# Altium PCB ppg_reconstruct.PcbDoc
Units mil, origin at the board's own origin, x right, y up, seen from the top; angles counter-clockwise.
Board outline 6000 x 4000 mil, 2 copper layers (Top Layer, Bottom Layer); 19 components, 10 nets, 70 pads, 12 vias.
Unrouted connection lines stored in the file: 5.
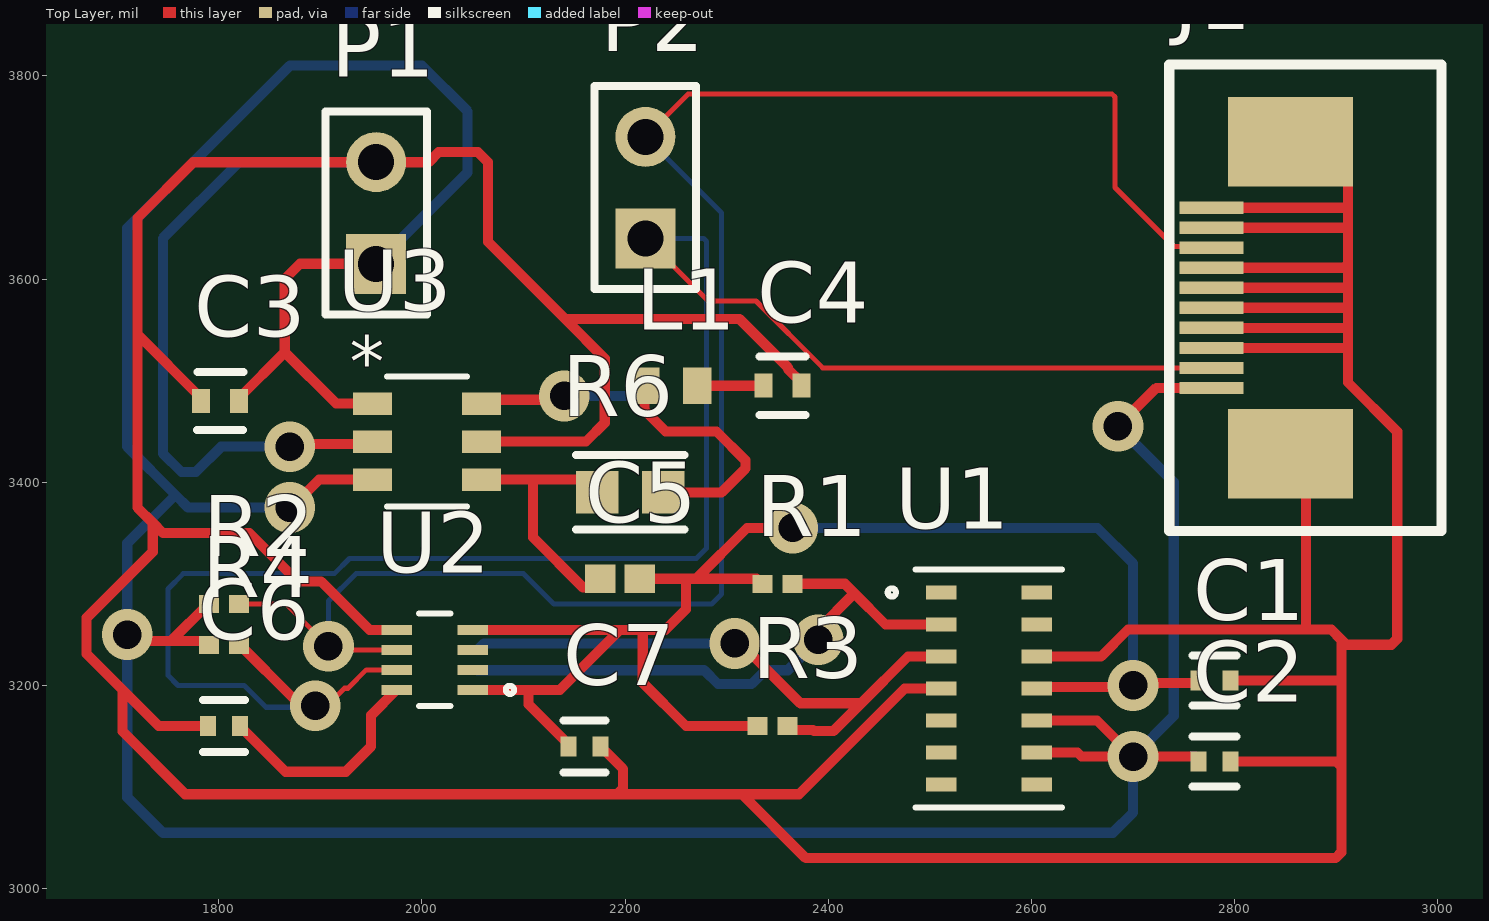
[diagram p0: Top Layer view]
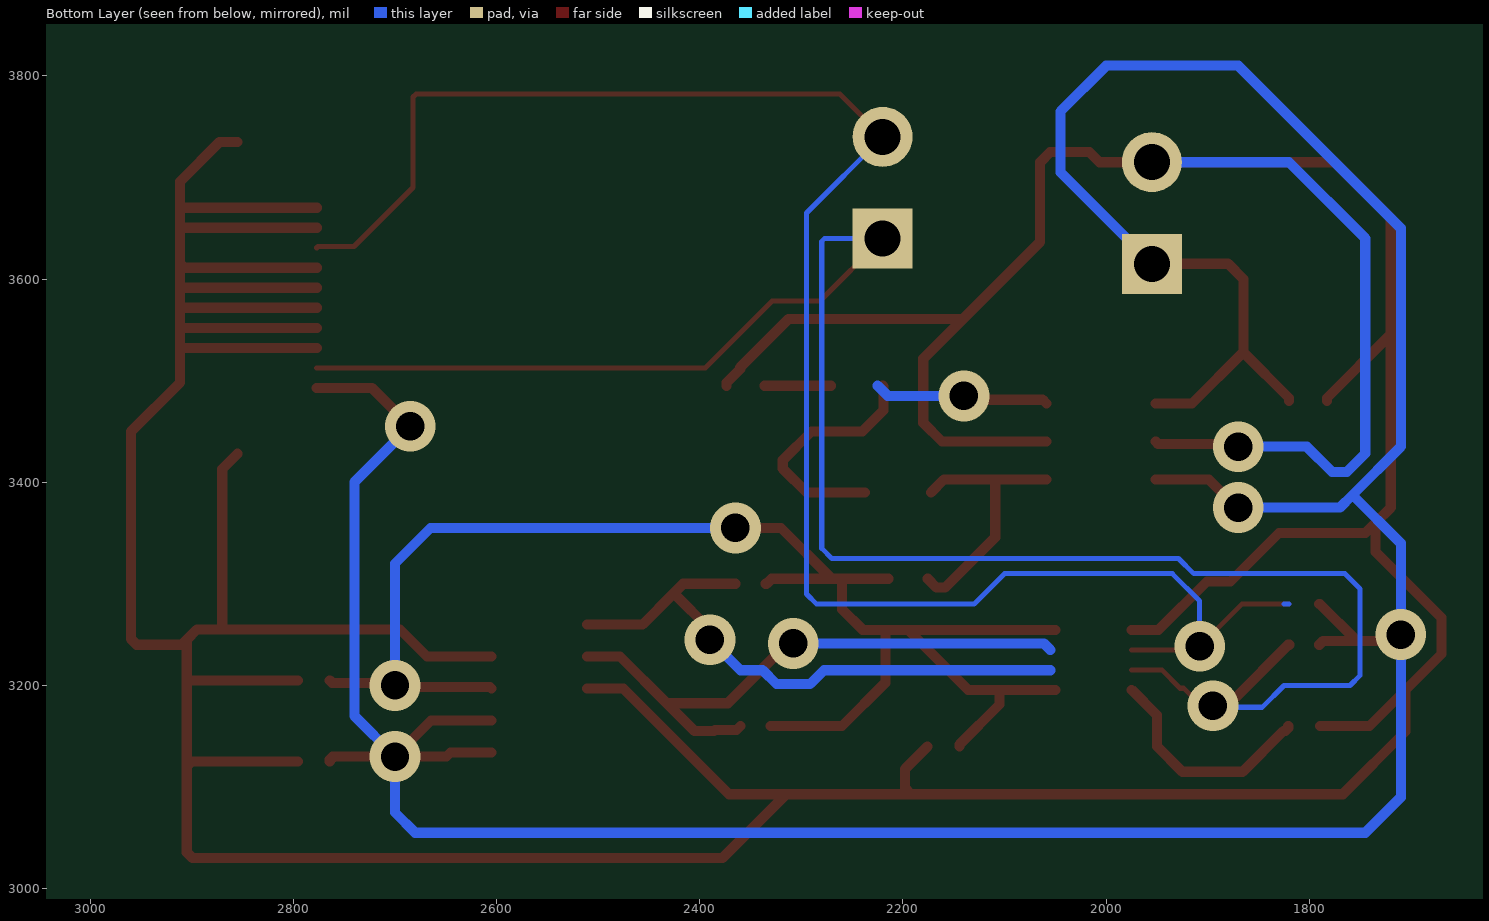
[diagram p1: Bottom Layer view, seen from below]
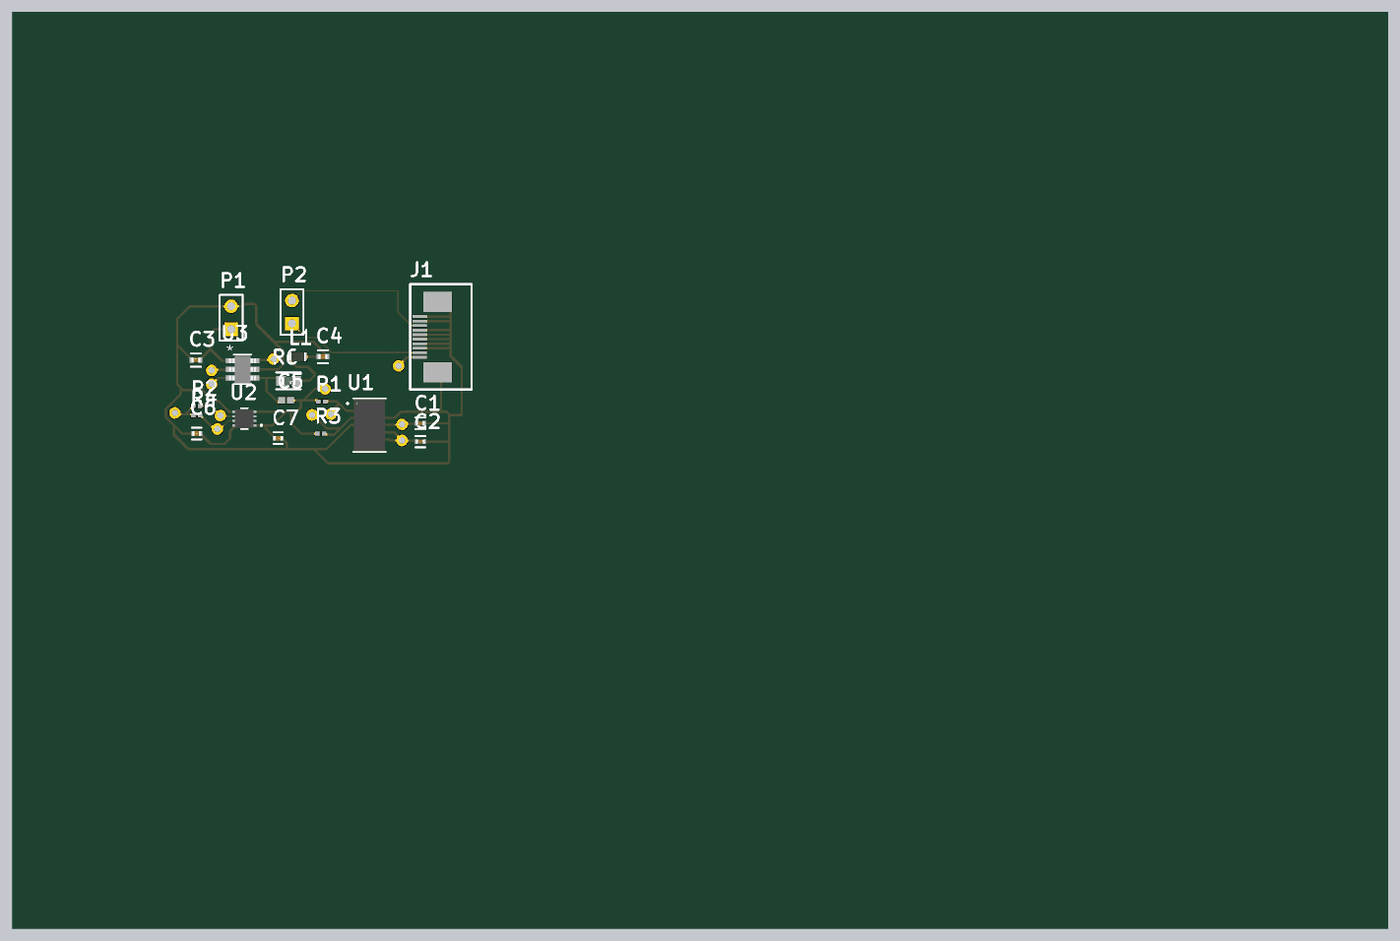
[diagram p2: 3D render of the assembled board from above, using the file's embedded part models]

## Layer stack, top to bottom
Top Solder: solder mask 0.4, Solder Resist, Dk 3.5
Top Layer: signal copper 1.4
Dielectric 1: dielectric 12.6, FR-4, Dk 4.8
Bottom Layer: signal copper 1.4
Bottom Solder: solder mask 0.4, Solder Resist, Dk 3.5

## Board outline
1000,1000 7000,1000 7000,5000 1000,5000

## Design rules (kind name [scope] priority, off if disabled: settings)
Clearance [All] p1: gap=10 ignorepadtopadclearanceinfootprint=FALSE except(0: Arc-Hole Track-Hole SMDPad-Hole THPad-Hole Via-Hole Fill-Hole Poly-Hole Region-Hole Text-Hole)
PolygonConnect [All] p1: connectstyle=Relief reliefconductorwidth=10 reliefentries=4 polygonreliefangle="90 Angle" airgapwidth=10
RoomDefinition ppg_reconstruct [InComponentClass('ppg_reconstruct')] p1: confinementstyle=ConfineIn formatcopy=TRUE lockcomponents=FALSE outline 2063,3985.51 5548,3985.51 5548,4565.51 2063,4565.51
RoutingVias [All] p1: holewidth=28 width=50 viastyle="Through Hole" minholewidth=28 minwidth=50 maxholewidth=28 maxwidth=50
SolderMaskExpansion [All] p1: expansion=4 istentingtop=FALSE
Width [All] p1: maxlimit=15 minlimit=1 preferedwidth=10 checkconnectedcopper=TRUE
30 further rules are at their usual default settings.

## Components (designator, comment, footprint, x,y, rotation, side; value= is the part's Value field where it differs from the comment)
C1 "GRM155R61A105KE15D" FP-GRM15-0_1-MFG 2780,3205 r0 top value=1uF
C2 "GRM155R61A105KE15D" FP-GRM15-0_1-MFG 2780,3125 r0 top value=1uF
C3 "GRM155R60J475ME87D" FP-GRM155-0_15-MFG 1801.3,3480 r180 top
C4 "GRM155R60J475ME87D" FP-GRM155-0_15-MFG 2355,3495 r0 top
C5 "GRM155R71E562KA01D" CAPC1005X55X25ML05T10 2195,3305 r0 top
C6 "C1005X7R1C104K050BC" FP-C1005-050-0_05-MFG 1805,3160 r180 top
C7 "C1005X7R1C104K050BC" FP-C1005-050-0_05-MFG 2160,3140 r0 top
J1 "ZF5S-10-01-X-WT" ZF5S-10-01-X-WT 2777,3581.5 r90 top
L1 "GLFR1608T4R7M-LR" INDC1608X100X35LL20T15 2245.59,3495 r0 top
P1 "Header 2" HDR1X2 1955,3615 r90 top
P2 "Header 2" HDR1X2 2220,3640 r90 top
R1 "RC0402JR-074K7L" RESC1005X40X25LL05T10 2350,3300 r0 top
R2 "RC0402JR-074K7L" RESC1005X40X25LL05T10 1805.24,3280 r0 top
R3 "RC0402JR-074K7L" RESC1005X40X25LL05T10 2345.24,3160 r0 top
R4 "RC0402JR-074K7L" RESC1005X40X25LL05T10 1805,3240 r0 top
R6 "MCT06030C4751FP500" FP-MCT0603-IPC_A 2205,3390 r0 top
U1 "MAX30102EFD+" 21-1048_F143A5+1_MXM 2558,3197.01 r0 top
U2 "MAX14595ETA+" 21-0487_T822CN+1_MXM 2012.5,3225.16 r180 top
U3 "MAX1921EUT18+" 21-0058I_MXM 2005,3440 r0 top

## Footprints (in the part's own frame and the unit in brackets; to place one, negate y for a bottom-side part, rotate by r counter-clockwise, add the part's x,y. Pads: shape width x height; smd on the part's side, far side on the other; paste and mask are expansions set on the pad)
21-0058I_MXM [mil]
  rect 38.5x22 smd paste+0 mask+0: 1(-53.75,37.4) 2(-53.75,0) 3(-53.75,-37.4) 4(53.75,-37.4) 5(53.75,0) 6(53.75,37.4)
  silkscreen extent -40,-64 40,64, body extent -59,-59 59,59, height 57
21-0487_T822CN+1_MXM [mil]
  rect 30x10 smd paste+0 mask+0: 1(-37.5,29.53) 2(-37.5,9.84) 3(-37.5,-9.84) 4(-37.5,-29.53) 5(37.5,-29.53) 6(37.5,-9.84) 7(37.5,9.84) 8(37.5,29.53)
  silkscreen extent -78,-46 15,46, body extent -41,-41 41,41, height 32
21-1048_F143A5+1_MXM [mil]
  rect 30x14 smd paste+0 mask+0: 1(-47,94.49) 2(-47,62.99) 3(-47,31.5) 4(-47,0) 5(-47,-31.5) 6(-47,-62.99) 7(-47,-94.49) 8(47,-94.49) 9(47,-62.99) 10(47,-31.5) 11(47,0) 12(47,31.5) 13(47,62.99) 14(47,94.49)
  silkscreen extent -99,-117 72,117, body extent -67,-112 67,112, height 65
CAPC1005X55X25ML05T10 [mm] "Chip Capacitor, 2-Leads, Body 1.00x0.50mm, IPC Low Density"
  rect 0.76x0.72 smd: 1(-0.49,0) 2(0.49,0)
  body extent -0.53,-0.28 0.53,0.27, height 0.55
FP-C1005-050-0_05-MFG [mm]
  rect 0.4x0.5 smd paste+0 mask+0: 1(-0.4,0) 2(0.4,0)
  silkscreen extent -0.53,-0.65 0.53,0.65, body extent -0.7,-0.38 0.7,0.38, height 0.25
FP-GRM15-0_1-MFG [mm]
  rect 0.4x0.5 smd paste+0 mask+0: 1(-0.4,0) 2(0.4,0)
  silkscreen extent -0.55,-0.63 0.55,0.63, body extent -0.7,-0.38 0.7,0.38, height 0.25
FP-GRM155-0_15-MFG [mm]
  rect 0.45x0.6 smd paste+0 mask+0: 1(-0.475,0) 2(0.475,0)
  silkscreen extent -0.58,-0.73 0.58,0.72, body extent -0.8,-0.43 0.8,0.43, height 0.25
FP-MCT0603-IPC_A [mil]
  rect 41.88x41.82 smd paste+0 mask+0: 1(-32.65,0) 2(32.65,0)
  silkscreen extent -54,-37 54,37, body extent -73,-41 73,41, height 10
HDR1X2 [mm] "Connector; Header; 2 Position"
  rect 1.5x1.5 hole 0.9: 1(0,0)
  round 1.5 hole 0.9: 2(2.54,0)
  silkscreen extent -1.27,-1.27 3.81,1.27
INDC1608X100X35LL20T15 [mm] "Chip Inductor, 2-Leads, Body 1.8x1mm, IPC High Density"
  rect 0.71x0.92 smd: 1(-0.65,0) 2(0.65,0)
  body extent -0.9,-0.5 0.9,0.5, height 1
RESC1005X40X25LL05T10 [mm] "Chip Resistor, 2-Leads, Body 1.00x0.50mm, IPC High Density"
  rect 0.5x0.45 smd: 1(-0.375,0) 2(0.375,0)
  body extent -0.53,-0.27 0.53,0.28, height 0.4
ZF5S-10-01-X-WT [mil]
  rect 12x63 smd mask+2: 1(-88.65,0) 2(-68.95,0) 3(-49.25,0) 4(-29.55,0) 5(-9.85,0) 6(9.85,0) 7(29.55,0) 8(49.25,0) 9(68.95,0) 10(88.65,0)
  rect 88x123 smd mask+2: G1(-153.5,-78) G2(153.5,-78)
  silkscreen extent -230,-226 230,42

## Part data
C1 C2: library part CMP-2008-04556-2, "CAP CER 1UF 10V X5R 0402", Capacitance=1uF, Manufacturer=Murata, Package=GRM15-0.1, Temperature="-55°C to +85°C", Temperature Characteristic=X5R, Temperature Coefficient=15%, Temperature Range High=+85°C, Temperature Range Low=-55°C, Tolerance=10%, Voltage Rating=10V, Automotive=No, Category=Cap, ComponentLink2Description=Datasheet, ComponentLink2URL=https://search.murata.co.jp/Ceramy/image/img/A01X/G101/ENG/GRM155R61A105KE15-01A.pdf, Device Class L1="Passive Components", Device Class L2=Capacitors, Device Class L3="Ceramic Capacitors", Digikey Description="CAP CER 1UF 10V X5R 0402", Height=0.55mm, Ipc Land Pattern Name=CAPC10050X50, Lead Free=Yes, Manufacturer Part Number=GRM155R61A105KE15D, Material=Ceramic, Mouser Description="0402 1 uF 10 V ±10% Tolerance X5R Surface Mount Multilayer Ceramic Capacitor", Octopart=https://octopart.com/grm155r61a105ke15d-murata-197442, RoHS=TRUE
C3 C4: library part CMP-2008-04550-5, "Chip Multilayer Ceramic Capacitors for General Purpose, 0402, 4.7uF, X5R, 15%, 20%, 6.3V", Capacitance=4.7uF, Case Code (Imperial)=0402, Case Code (Metric)=1005, Dielectric=X5R, Max Operating Temperature=85°C, Min Operating Temperature=-55°C, Package Quantity=1, Tolerance=20%, Voltage=6.3V, Case/Package=0402, Construction=Flat, Depth=0.5mm, Height=0.5mm, Lead Free="Lead Free", Length=1mm, Mount="Surface Mount", Packaging="Tape and Reel", Radiation Hardening=No, REACH SVHC="No SVHC", Series=GRM, Thickness=0.022inch, Voltage Rating=6.3V, Voltage Rating (DC)=6.3V, Width=0.02inch
C5: library part CMP-2008-04631-1, Manufacturer=Murata, Part Number=GRM155R71E562KA01D
C6 C7: library part CMP-08246-004182-1, "Multilayer Ceramic Capacitors 100nF ±10% 16V X7R SMD 0402", Capacitance=100nF, Case Code (Imperial)=0402, Case Code (Metric)=1005, Dielectric=X7R, Dielectric Material=Ceramic, Max Operating Temperature=125°C, Min Operating Temperature=-55°C, Package Quantity=1, Tolerance=10%, Voltage=16V, Case/Package=0402, Construction=Flat, Depth=0.5mm, Height=0.5mm, Lead Free="Lead Free", Length=1mm, Mount="Surface Mount", Number of Pins=2, Packaging="Tape and Reel", Radiation Hardening=No, Resistor Type=Ceramic, RoHS Compliant=Yes, Series=C, Termination=SMD/SMT, Thickness=0.022inch, Voltage Rating=16V, Voltage Rating (DC)=16V, Weight=2.3E-05oz, Width=0.02inch
J1: "ZERO INSERTION FORCE 0.5MM ASSEMBLY, 01 LEAD STYLE.", Manufacturer=SAMTEC, CREATED="January 30, 2015 - Wendy Xin", PCB DECAL=ZF5S-10-01-X-WT
L1: library part CMP-2000-06322-1, "Chip Inductor, 4.7 uH, +/- 20%, -40 to 105 degC, 0603 (1608 Metric), RoHS, Tape and Reel", Current - Saturation=170mA, Current Rating=110mA, DC Resistance (DCR)=240mOhm, Inductance=4.7µH, Manufacturer=TDK, Operating Temperature=-40°C~105°C, Package / Case=0603(1608Metric), Package Description="2-Pin Surface Mount Device, Body 1.6 x 0.8 mm", Package Reference=0603, Standard Package=4,000, Tolerance=±20%, Catalog Drawings="1608(0603)Top /  / 1608(0603)Side", Category=Inductors,Coils,Chokes, Datasheet URL=http://media.digikey.com/pdf/Data%20Sheets/TDK%20PDFs/GLFR%20Series.pdf, Datasheet Version=07/2008, Dynamic Catalog=GLFRSeries, Family=FixedInductors, Manufacturer URL=http://www.tdk.com/, Mounting Technology=SurfaceMount, Mounting Type=SurfaceMount, Other Names=445-3607-2, Other Related Documents=1608(0603)Footprint, Packaging=Tape&Reel(TR), Series=GLFR, Shielding=Shielded, Size / Dimension="0.063\"Lx0.031\"Wx0.031\"H(1.60mmx0.80mmx0.80mm)"
P1 P2: "Header, 2-Pin", LatestRevisionDate=17-Jul-2002, LatestRevisionNote="Re-released for DXP Platform.", Publisher="Altium Limited"
R1 R2 R3 R4: library part CMP-2002-08011-1, Manufacturer="Yageo / Phycomp", Part Number=RC0402JR-074K7L
R6: library part CMP-02407-008681-1, "RES SMD 100 OHM 1% 1/8W 0603", Case Code (Imperial)=0603, Case Code (Metric)=1608, Max Operating Temperature=125°C, Max Power Dissipation=125mW, Min Operating Temperature=-55°C, Package Quantity=1, Resistance=4.75kR, Temperature Coefficient=50ppm/°C, Tolerance=1%, Case/Package=0603, Composition="Thin Film", Contact Plating=Tin, Depth=0.85mm, Height=0.022inch, Lead Free="Lead Free", Length=0.061inch, Military Standard=Not, Number of Terminations=2, Packaging="Tape and Reel", Radiation Hardening=No, Width=0.033inch
U1 U2 U3: "No Description Available", Mfr_Name="Analog Devices Inc", Copyright="Copyright (C) 2023 Ultra Librarian. All rights reserved.", RefDes=RefDes, Type=DEV
  U1: Manufacturer_Part_Number=MAX30102EFD+
  U2: Manufacturer_Part_Number=MAX14595ETA+
  U3: Manufacturer_Part_Number=MAX1921EUT18+

## Via types
v1: diameter 50, hole 28, Top Layer to Bottom Layer, 12 vias

## Nets (pads, with @x,y where several pads share a name; then routed paths per layer and width w, separated by ;. In a path a pad name is that pad's centre, name@x,y a point inside that pad or via, vN(x,y) a via of type N, cw(c..) or ccw(c..) an arc to the next point about the centre after c; other vN are vias at no path point)
1V8: C1.1 C5.2 C7.1 R1.1 R3.1 U1.11 U2.1 U2.4 | length 1543.4
  Top Layer w10: U2.1 2105,3195.63 ; U2.4 2195,3254.69 ; C7.1 2144.25,3141.97 2105,3181.22 2105,3195.63 ; C5.2 2260,3305 ; R3.1 2260,3160 2217.34,3202.66 2217.34,3254.69 ; R1.1 2334.25,3300 2329.25,3305 2270,3305 ; v1(2365,3355) 2320,3355 2270,3305 ; U1.11 2606.5,3198.5 2698.5,3198.5 2702.5,3202.5 2761.75,3202.5 C1.1 ; 2105,3195.63 2135.94,3195.63 2195,3254.69 ; 2195,3254.69 2217.34,3254.69 ; 2217.34,3254.69 2239.69,3254.69 2260,3275 2260,3305 ; 2260,3305 2270,3305
  Bottom Layer w10: v1(2365,3355) 2665,3355 2700,3320 v1(2700,3200)
GND: C1.2 C2.2 C3.2 C4.2 C6.2 C7.2 J1.3 J1.4 J1.5 J1.6 J1.7 J1.9 J1.10 J1.G1 J1.G2 P1.2 U1.4 U1.12 U2.5 U3.2 U3.5 | length 6802.1
  Top Layer w10: C3.2 1782.6,3482.95 1720,3545.55 ; C6.2 1740.86,3160 1705.43,3195.43 ; v1(1870,3435) 1872.5,3437.5 1948.75,3437.5 U3.2 ; U2.5 1948.45,3254.69 1900.79,3302.34 1877.66,3302.34 1830,3350 1745,3350 1735,3360 ; U3.5 2161.57,3440 2180,3458.43 2180,3521.57 2140.78,3560.78 ; C7.2 2197.9,3117.85 2197.9,3098.76 2192.04,3092.9 ; C4.2 2373.7,3497.95 2360.16,3511.5 2360.16,3513.02 2312.4,3560.78 2140.78,3560.78 ; U1.4 2475.29,3197.01 2371.19,3092.9 2315,3092.9 ; U1.12 2668.5,3228.5 2695,3255 2870,3255 ; J1.3 2908.75,3532.25 2911.5,3535 ; J1.4 2909.55,3551.95 2911.5,3550 ; J1.5 2909.85,3571.65 2911.5,3570 ; J1.6 2910.15,3591.35 2911.5,3590 ; J1.7 2907.55,3611.05 2911.5,3615 ; J1.9 2911.05,3650.45 2911.5,3650 ; J1.10 2911.35,3670.15 2911.5,3670 ; C2.2 2900.43,3125 2905,3120.43 ; C1.2 2905,3205 ; J1.G1 2870,3413 2870,3255 ; J1.G2 2872.5,3735 2911.5,3696 2911.5,3670 ; 1705.43,3195.43 1670,3230.86 1670,3266.57 1735,3331.57 1735,3360 ; 1705.43,3195.43 1705.43,3154.57 1767.1,3092.9 2192.04,3092.9 ; 1720,3545.55 1720,3375 1735,3360 ; 1720,3545.55 1720,3660 1775,3715 P1.2 2006.64,3715 2016.64,3725 2055,3725 2065,3715 2065,3636.57 2140.78,3560.78 ; 2192.04,3092.9 2315,3092.9 ; 2315,3092.9 2377.9,3030 2899.14,3030 2905,3035.86 2905,3120.43 ; 2870,3255 2895,3255 2905,3245 ; 2905,3120.43 2905,3205 ; 2905,3205 2905,3245 ; 2905,3245 2910,3240 2954.14,3240 2960,3245.86 2960,3449.71 2911.5,3498.21 2911.5,3535 ; 2911.5,3535 2911.5,3550 ; 2911.5,3550 2911.5,3570 ; 2911.5,3570 2911.5,3590 ; 2911.5,3590 2911.5,3615 ; 2911.5,3615 2911.5,3650 ; 2911.5,3650 2911.5,3670
  Bottom Layer w10: v1(1870,3435) 1802.52,3435 1777.52,3410 1763.28,3410 1745,3428.28 1745,3640 1820,3715 P1.2
NetC4_1: C4.1 L1.2 | length 65.1
  Top Layer w10: L1.2 C4.1
NetC5_1: C5.1 R6.1 U3.4 | length 266.2
  Top Layer w10: U3.4 2109.25,3402.6 ; R6.1 2159.75,3402.6 2109.25,3402.6 ; C5.1 2167,3296.29 2158.71,3296.29 2109.25,3345.75 2109.25,3402.6
NetL1_1: L1.1 R6.2 U3.6 | length 416.3
  Top Layer w10: U3.6 2062.55,3481.2 2136.2,3481.2 v1(2140,3485) ; L1.1 2219.14,3494.14 2219.14,3470.86 2240,3450 2290,3450 2318.36,3421.64 2318.36,3413.36 2295,3390 R6.2
  Bottom Layer w10: v1(2140,3485) 2215,3485 2225,3495
NetR1_2: R1.2 U1.2 U2.2 | length 581.9
  Top Layer w10: R1.2 2416.3,3300 2425.65,3290.65 ; v1(2390,3245) 2390,3255 2425.65,3290.65 ; U1.2 2456.3,3260 2425.65,3290.65
  Bottom Layer w10: 2055,3215 2277.76,3215 2291.39,3201.37 2324.52,3201.37 2338.15,3215 2360,3215 v1(2390,3245)
NetR3_2: R3.2 U1.3 U2.3 | length 588
  Top Layer w10: v1(2307.95,3241.37) 2309.32,3240 2315,3240 2372.5,3182.5 2432.5,3182.5 ; R3.2 2363.86,3156.14 2384.84,3156.14 2385.98,3155 2405,3155 2432.5,3182.5 ; U1.3 2478.5,3228.5 2432.5,3182.5
  Bottom Layer w10: 2055,3235 2061.37,3241.37 v1(2307.95,3241.37)
SCL: J1.2 P2.1 R4.2 U2.7 | length 1958
  Top Layer w5: v1(1895,3180) 1906.46,3180 1923.71,3197.25 1927.25,3197.25 1945.32,3215.32 U2.7 ; P2.1 2281.72,3578.28 2328.76,3578.28 2394.5,3512.55 J1.2
  Top Layer w10: R4.2 1820.75,3240 1873.09,3187.65 1887.35,3187.65 v1(1895,3180)
  Bottom Layer w5: v1(1895,3180) 1893.49,3178.49 1846.51,3178.49 1825,3200 1760,3200 1750,3210 1750,3295 1765,3310 1913.79,3310 1928.79,3325 2270,3325 2280,3335 2280,3637.07 2277.07,3640 P2.1
SDA: J1.8 P2.2 R2.2 U2.6 | length 1808
  Top Layer w5: R2.2 1866.47,3280 1907.89,3238.58 v1(1907.99,3238.58) ; v1@1907.99,3238.48 1911.47,3235 U2.6 ; P2.2 2261.97,3781.97 2679.34,3781.97 2682.26,3779.04 2682.26,3690.01 2740.32,3631.95 2775.8,3631.95 J1.8
  Bottom Layer w5: 1820,3280 1825,3280 ; v1(1907.99,3238.58) 1907.99,3282.99 1935,3310 2100,3310 2130,3280 2285,3280 2295,3290 2295,3665 P2.2
VIN: C2.1 C3.1 C6.1 J1.1 P1.1 R2.1 R4.1 U1.9 U1.10 U2.8 U3.1 U3.3 | length 3934.5
  Top Layer w10: v1(1710,3250) 1716.14,3243.86 1753.35,3243.86 ; R4.1 1786.38,3243.86 1753.35,3243.86 ; R2.1 1789.49,3280 1753.35,3243.86 ; C3.1 1820,3482.95 1865,3527.95 ; C6.1 1820.75,3158.03 1823.62,3155.16 1825.59,3155.16 1865.75,3115 1925,3115 1950,3140 1950,3170.63 U2.8 ; v1(1870,3375) 1871.37,3375 1898.97,3402.6 U3.3 ; U3.1 1915.55,3477.4 1865,3527.95 ; P1.1 1880,3615 1865,3600 1865,3527.95 ; U1.9 2645.25,3134.02 2649.27,3130 v1(2700,3130) ; U1.10 2664.49,3165.51 v1(2700,3130) ; v1(2685,3455) 2722.85,3492.85 J1.1 ; C2.1 2764.25,3126.97 2761.38,3129.84 2759.41,3129.84 2759.25,3130 v1(2700,3130)
  Bottom Layer w10: v1(1870,3375) 1770,3375 1757.5,3387.5 ; P1.1 2045,3705 2045,3765 2000,3810 1870,3810 1710,3650 1710,3435 1757.5,3387.5 ; v1(2685,3455) 2740,3400 2740,3170 v1(2700,3130) 2700,3075 2680,3055 1745,3055 1710,3090 1710,3340 1757.5,3387.5
pads on no net: U1.1 U1.5 U1.6 U1.7 U1.8 U1.13 U1.14

## Text inside footprints (layer, text, board x,y; h text height)
U3: Top 3D Body "*" at 1973,3446 h50; Top Overlay "*" at 1928.75,3494.4 h50